# Altium PCB Mini-Rambo.PcbDoc (part 3 of 3)
Units mil, origin at the board's own origin, x right, y up, seen from the top; angles counter-clockwise.
Board outline 4133.86 x 2795.28 mil, 4 copper layers (Top, GND, Supply, Bottom), stack 61.811 mil thick; 295 components, 208 nets, 992 pads, 488 vias.
Unrouted connection lines stored in the file: 73.
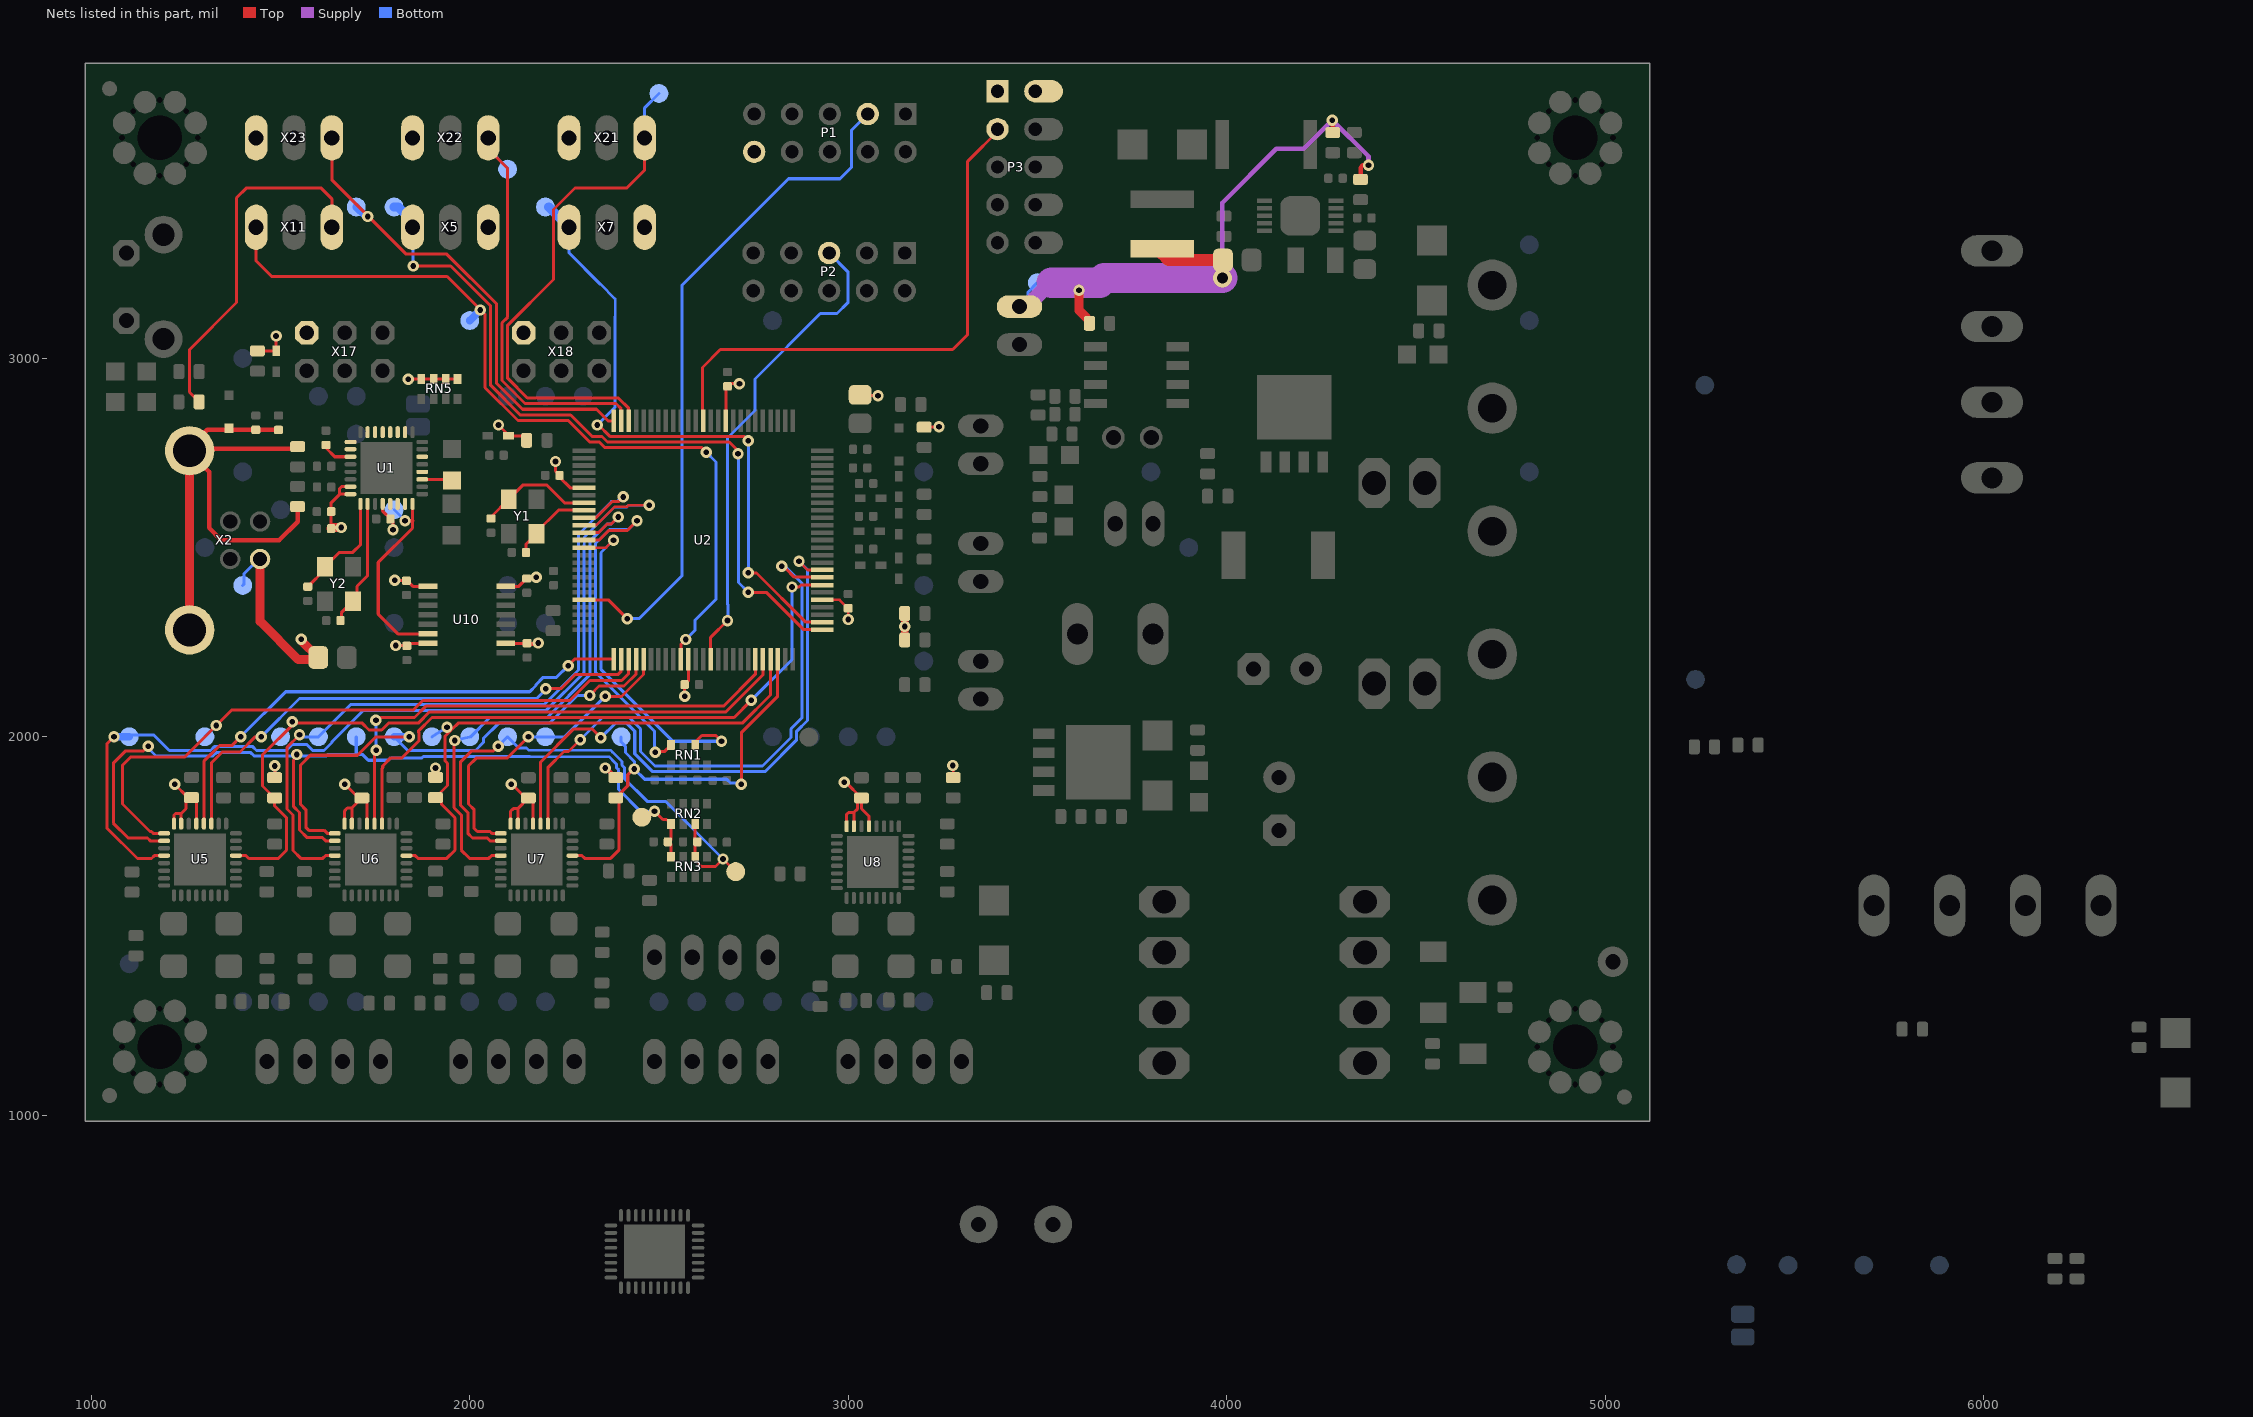
[diagram p5: the nets of this part, all layers, seen from the top]

## Via types
v1: diameter 30, hole 15, Top to Bottom, tented both sides, 231 vias
v2: diameter 30, hole 15, Top to Bottom, 224 vias
v3: diameter 19.68, hole 7.87, Top to Bottom, 12 vias
v4: diameter 32, hole 15, Top to Bottom, tented both sides, 11 vias
v5: diameter 50, hole 28, Top to Bottom, tented both sides, 3 vias
v6: diameter 50, hole 30, Top to Bottom, 3 vias
v7: diameter 45, hole 25, Top to Bottom, tented both sides, 1 vias
v8: diameter 40, hole 20, Top to Bottom, 1 vias
v9: diameter 30, hole 15, Top to Bottom, tented top, 1 vias
v10: diameter 32, hole 15, Top to Bottom, 1 vias

## Nets (pads, with @x,y where several pads share a name; then routed paths per layer and width w, separated by ;. In a path a pad name is that pad's centre, name@x,y a point inside that pad or via, vN(x,y) a via of type N, cw(c..) or ccw(c..) an arc to the next point about the centre after c; other vN are vias at no path point) (continued)
TX0-I: TP26.TP U1.8 U10.6 | length 542.7
  Top w8: U1.8@1848.9,2615.51 1848.43,2615.04 1848.43,2551.18 1758.17,2460.92 1758.17,2323.91 1810.04,2272.04 U10.6@1889.76,2272.04
  Top w10: v1(1829,2571) 1848.43,2571
  Bottom w7: TP26.TP@1800,2600 v1(1829,2571)
TX1: P1.3 U2.46 | length 1830
  Top w8: U2.46@2301.83,2362 2366.35,2362 v2(2416.34,2312.01)
  Bottom w8: v2(2416.34,2312.01) 2447.2,2312.01 2560.79,2425.59 2560.79,3193.22 2842.21,3474.65 2978.58,3474.65 3008.86,3504.92 3008.86,3602.95 P1.3@3051.57,3645.67
TX2: P3.3 U2.13 | length 1469.3
  Top w8: U2.13@2616.79,2834.96 2614.78,2836.97 2614.78,2975.96 2662.2,3023.39 3276.25,3023.39 3315.84,3062.97 3315.84,3520.84 P3.3@3400,3605
  Bottom w7: P3.3@3386.5,3605 P3.3@3400,3605
TX3: P2.5 U2.64 | length 1271.2
  Top w8: U2.64@2636.79,2205 2636.79,2262.77 v1(2681.1,2307.09)
  Bottom w8: v1(2681.1,2307.09) 2682.09,2308.07 2682.09,2349.27 2680.59,2350.76 2680.59,2355.14 2680.83,2355.38 2680.83,2789.37 2753.6,2862.14 2753.6,2945.55 2926.4,3118.35 2970.71,3118.35 2999.02,3146.65 2999.02,3229.13 P2.5@2949.61,3278.54
TXL: LED4.C U1.11 | length 79.5
  Top w8: U1.11@1874.49,2680.47 1949.77,2680.47 LED4.C@1952.76,2677.49
U1-PB0: U1.14
U1-PB4: U1.18
U1-PB5: U1.19
U1-PB6: U1.20
U1-PB7: U1.21
U1-PC2: U1.5
U1-PC4: U1.26
U1-PC5: U1.25
U1-PC6: U1.23
U1-PC7: U1.22
U1-PD0: U1.6
U1-PD1: U1.7
U1-PD6: U1.12
USBVCC: C2.2 C11.1 C14.1 C15.1 C67.2 C70.1 D4.C R47.2 RN5.1 RN5.2 RN5.3 RN5.4 TP46.TP U1.4 U1.31 U1.32 U10.1 U10.7 X2.1 X17.2 | length 1208.1
  Top w8: R47.2@1438.97,3019.89 1439.17,3019.69 D4.C@1489.17,3019.69 1488.19,3020.67 v2(1488.19,3059.06) ; C11.1@1633.7,2550 C15.1@1633.7,2595 1633.7,2618.7 1656.1,2641.1 ; U1.32@1685,2641.1 1656.1,2641.1 ; U1.31@1685,2660.79 1660.79,2660.79 1656.1,2656.1 1656.1,2641.1 ; U1.4@1770,2615.51 1770,2596.14 C14.1@1790.35,2575.79 1797.24,2568.9 1797.24,2546.26 1797,2546.5 v2(1797,2547) ; v2(1802.17,2413.39) 1831.69,2413.39 C70.1@1832.68,2412.4 1834.65,2412.4 1849.51,2397.54 U10.1@1889.76,2397.54 ; v2(1804.13,2241.14) 1832.98,2241.14 C67.2@1833.66,2240.46 1840.24,2247.04 U10.7@1889.76,2247.04 ; v2(1837.6,2944.88) 1871.29,2944.88 RN5.4@1872.28,2945.87 RN5.3@1904.28,2945.87 RN5.2@1936.02,2945.87 RN5.1@1967.52,2945.87
  Top w24: X2.1@1445.84,2469.68 1445.84,2304.9 1547,2203.74 1593.89,2203.74 C2.2@1599.8,2209.65 1555.12,2254.32 v2(1555.12,2257.87) ; C11.1@1633.7,2550 1636.85,2553.15 v2(1660.43,2553.15)
  Bottom w8: TP46.TP@1400,2400 1403,2403 1403,2430 1442.68,2469.68 X2.1@1445.84,2469.68
USHIELD: C63.1 D16.A R72.2 RV1.1 RV2.1 X2.P$1 X2.P$2 | length 1560
  Top w12: X2.P$1@1257.58,2753.64 1250,2761.22 X2.P$1@1256.22,2761.22 ; X2.P$1@1259.84,2751.38 1311,2700.22 1311,2552.33 1343.64,2519.68 1496.06,2519.68 1545,2568.62 RV1.1@1545,2608.23 ; R72.2@1494.53,2811.01 1306.01,2811.01 X2.P$1@1256.22,2761.22 ; RV2.1@1539.45,2761.22 X2.P$1@1256.22,2761.22
  Top w24: X2.P$2@1259.84,2282.68 1259.84,2751.38 X2.P$1@1259.84,2755.91
VCC: C7.1 C8.1 C9.1 C17.1 C18.1 C23.1 C24.1 C25.1 C45.1 C52.1 C68.2 C69.1 D3.C L1.2 L2.1 P1.10 P3.1 P3.2 R5.2 R11.2 R23.1 R31.2 R35.1 R36.2 R46.2 R59.1 R60.1 R61.1 R62.1 TP32.TP U2.10 U2.31 U2.61 U2.80 U5.13 U5.15 U5.16 U6.13 U6.15 U6.16 U7.13 U7.15 U7.16 U8.13 U8.15 U8.16 U10.10 U10.16 X1.2 X5.3 X7.3 X11.3 X18.2 X21.3 X22.3 X23.3 | length 4756.9
  Top w7: U2.80@2931.79,2362 2977.57,2362 C8.1@3000,2339.57 v1(3000,2310.04) ; v2(3276.57,1924.21) 3277.56,1923.23 R62.1@3277.56,1892.1
  Top w8: U5.16@1218.4,1770.5 1218.4,1793.4 1222.4,1797.4 1237.4,1797.4 ; v1(1220,1875) C24.1@1255,1840 ; U5.15@1237.4,1770.5 1237.4,1797.4 ; U5.13@1277.4,1770.5 1277.4,1826.73 C24.1@1264.76,1839.37 1255.63,1839.37 C24.1@1255,1840 ; R35.1@1284.77,2885 1259.2,2910.57 1259.2,3022.98 1383.86,3147.64 1383.86,3424.21 1410.43,3450.79 1606.3,3450.79 1635.43,3421.65 X11.3@1635.43,3346.46 ; R60.1@1484.26,1891.93 1485,1892.67 v2(1485,1923) ; U6.16@1669.31,1770.5 1669.31,1804.31 1676.54,1811.54 1688.31,1811.54 ; v1(1670,1875) 1706.77,1838.23 C23.1@1715,1838.23 ; U6.15@1688.31,1770.5 1688.31,1811.54 ; U6.13@1728.31,1770.5 1728.31,1824.92 C23.1@1715,1838.23 ; v2(2075.79,2823.82) 2102.36,2797.24 D3.C@2102.36,2795.28 2138.58,2795.28 R46.2@2150.39,2783.46 ; U10.10@2095.13,2247.04 2151.27,2247.04 C68.2@2151.57,2247.35 2151.87,2247.05 2180.12,2247.05 2176.42,2243.35 C68.2@2161.49,2243.35 ; U10.16@2095.13,2397.54 2129.82,2397.54 C69.1@2150.59,2418.31 2153.66,2421.38 v2(2175.3,2421.38) ; U7.16@2107.93,1770.5 2107.93,1802.93 2115.16,1810.16 2126.93,1810.16 ; v1(2110,1875) 2111,1875 2147.77,1838.23 C18.1@2155,1838.23 ; U7.15@2126.93,1770.5 2126.93,1810.16 ; U7.13@2166.93,1770.5 2166.93,1826.3 C18.1@2155,1838.23 ; v2(2226.38,2727.36) 2226.38,2701.77 C9.1@2237.2,2690.94 2237.2,2685.8 2265.2,2657.8 U2.31@2301.83,2657.8 ; v2(2567.91,2107.28) C7.1@2567.91,2137.8 2577.42,2147.3 U2.61@2577.42,2205 ; U2.10@2676.79,2834.96 2676.79,2921.87 C52.1@2681.1,2926.18 2687.99,2933.07 v2(2712.6,2933.07) ; v1(2990,1880) 2993.23,1880 C17.1@3035,1838.23 ; U8.16@2995.96,1763.61 2995.96,1795 3000.96,1800 3014.96,1800 ; U8.15@3014.96,1763.61 3014.96,1800 ; L2.1@3031.5,2903.54 3033.47,2901.57 3078.74,2901.57 v2(3078.89,2901.42) ; U8.13@3054.96,1763.61 3054.96,1790.04 3035,1810 C17.1@3035,1838.23 ; v2@3149.41,2291.14 v2(3149.61,2291.34) v2@3149.41,2291.54 ; R31.2@3200.78,2818.11 3201.57,2818.9 v2(3240.16,2818.9) ; 1237.4,1797.4 1250,1810 1250,1840 C24.1@1255,1840 ; 1688.31,1811.54 C23.1@1715,1838.23 ; 2126.93,1810.16 C18.1@2155,1838.23 ; 3014.96,1800 3025,1810.04 3025,1828.23 C17.1@3035,1838.23
  Top w12: v2(2358.27,1917.32) 2360.61,1917.32 R61.1@2385.83,1892.1 ; v2(4279.56,3629.23) 4280.55,3628.24 R23.1@4280.55,3596.94 ; R11.2@4354,3472.77 4354,3504 4360,3510 v1(4375,3510)
  Top w20: R5.2@3149.41,2255.9 v2@3149.41,2291.14 ; v2@3149.41,2291.54 R36.2@3149.41,2325.78
  Top w24: v2(3610,3180) 3610,3126.77 C25.1@3630,3106.77
  Top w32: L1.2@3830,3276.26 3846.26,3260 C45.1@3990.6,3260
  Supply w12: v6(3989.05,3212.35) 3989.05,3411.65 4131.4,3554 4204.33,3554 v2(4279.56,3629.23) 4375,3533.79 v1(4375,3510)
  Supply w40: X1.2@3452.76,3136.61 3471.61,3136.61 3535,3200 3537.57,3200
  Supply w80: 3537.57,3200 3664.68,3200 3677.03,3212.35 v6(3989.05,3212.35)
  Bottom w8: X1.2@3452.76,3136.61 3452.76,3136.76 3477,3161 3475,3163 3475,3175 TP32.TP@3500,3200
  other v2: 1909.45,1917.32 2181.1,2248.03
VUCAP: C16.1 U1.27 | length 74.6
  Top w8: C16.1@1620,2763.23 1643.23,2740 U1.27@1685,2740
X-DIR: TP1.TP U2.36 U5.20 | length 2563.7
  Top w7: 2332.68,2559.37 2334.52,2559.37 2382.7,2607.55 2415.26,2607.55 2419.92,2612.2 v2(2474.41,2612.2)
  Top w8: v1(1060,2000) 1041.01,1981.01 1041.01,1759.21 1121.69,1678.54 1158.99,1678.54 1166.31,1685.85 U5.20@1192.4,1685.85 ; U2.36@2301.83,2559.37 2332.68,2559.37
  Bottom w7: 2302.41,2506.89 2302.41,2526.82 2382.43,2606.84 2414.56,2606.84 2419.92,2612.2 v2(2474.41,2612.2)
  Bottom w8: TP1.TP@1100,2000 1105,2005 1165,2005 1206,1964 1314.91,1964 1324.91,1974 1426.5,1974 1436.5,1964 1514.91,1964 1529.91,1979 1570.09,1979 1585.09,1964 1614.91,1964 1636,1985.09 1636,1986.91 1719.09,2070 2202.38,2070 2302.41,2170.03 2302.41,2506.89
  Bottom w20: v1(1060,2000) TP1.TP@1100,2000
X-EN: R60.2 TP4.TP U2.71 U5.5 | length 1952.4
  Top w8: U5.5@1381.89,1685.85 1408.84,1685.85 1416.15,1678.54 1494.26,1678.54 1515.94,1700.21 1515.94,1786.06 1484.26,1817.74 R60.2@1484.26,1838.38 1452.57,1870.07 1452.57,1952.57 v1@1536,2036 ; v1(1531,2040) 1535,2036 v1@1536,2036 ; U2.71@2774.79,2205 2774.79,2163.92 2676.87,2066 1893.88,2066 1863.88,2036 1785.09,2036 1767.09,2018 1734,2018 1716,2036 v1@1536,2036
  Bottom w8: TP4.TP@1500,2000 1534,2034 1534,2037 v1(1531,2040)
X-MAX: TP49.TP U2.60 X11.1 | length 2221.2
  Top w8: X11.1@1435.43,3346.46 1435.43,3257.48 1476.38,3216.54 1940.46,3216.54 v1@2028.5,3128.5 ; 2040.13,3116.87 2040.13,2922.65 2127.22,2835.56 2260.46,2835.56 2317.47,2778.54 2343,2778.54 2357.58,2763.96 2613.27,2763.96 v2(2625.13,2752.1) ; U2.60@2557.73,2205 2557.73,2243.74 v2(2570.99,2257)
  Bottom w8: v2(2570.99,2257) 2595.37,2281.38 2595.37,2307.97 2650.59,2363.19 2650.59,2367.57 2650.83,2367.8 2650.83,2726.4 v2(2625.13,2752.1)
  Bottom w20: TP49.TP@2000,3100 v1(2028,3128)
X-MIN: TP38.TP U2.25 X23.1 | length 1283
  Top w8: X23.1@1635.43,3582.68 1635.43,3471.86 1831.84,3275.46 1939.54,3275.46 2070.13,3144.87 2070.13,2935.08 2139.64,2865.56 2334.65,2865.56 2365.24,2834.96 U2.25@2380.57,2834.96
  Bottom w8: v1@1725,3375 v1(1730,3375)
  Bottom w20: TP38.TP@1700,3400 v1@1725,3375
X-MS1: U2.52 U5.11 | length 1378.1
  Top w8: U5.11@1316.93,1770.5 1316.93,1930.74 1345.83,1959.65 1392.72,1959.65 1433.07,2000 v2(1448.82,2000) ; v2(2200.89,2127.07) 2202,2127.07 2241.25,2127.07 2278.17,2164 2391.12,2164 2400.25,2173.13 U2.52@2400.25,2205
  Bottom w8: v2(1448.82,2000) 1549.82,2101 2177,2101 2202,2126 v2(2200.89,2127.07)
X-MS2: U2.51 U5.12 | length 1361
  Top w8: U5.12@1297.24,1770.5 1297.24,1935.1 1338.79,1976.65 1371.06,1976.65 v2(1394.42,2000) ; v2(2260,2188) 2277,2205 U2.51@2380.57,2205
  Bottom w8: v2(1394.42,2000) 1513.42,2119 2158.23,2119 2174.89,2135.66 2174.89,2137.84 2194.05,2157 2229,2157 v2(2260,2188)
X-STEP: TP2.TP U2.53 U5.17 | length 1762.5
  Top w8: U5.17@1192.4,1744.91 1163.56,1744.91 1158.93,1749.54 1155.21,1749.54 1082.48,1822.26 1082.48,1924.84 1103.64,1946 1246,1946 v1(1330,2030) 1371,2071 1851,2071 1876,2096 2264.21,2096 2317.21,2149 2401.5,2149 2419.94,2167.44 U2.53@2419.94,2205
  Bottom w8: TP2.TP@1300,2000 v1(1330,2030)
XT1: C13.1 U1.1 Y2.1 | length 297.2
  Top w8: C13.1@1571.85,2396.65 1617.54,2442.34 Y2.1@1617.54,2449.4 1655.54,2487.4 1690.94,2487.4 1711,2507.45 U1.1@1711,2615.51
XT2: C12.1 U1.2 Y2.3 | length 313.6
  Top w8: C12.1@1658.46,2307.09 1660.43,2309.06 1660.43,2327.6 Y2.3@1690.95,2358.12 ; Y2.3@1703.74,2378.94 1701.77,2380.91 1701.77,2397.66 1729.65,2425.54 1729.65,2615.17 U1.2@1730,2615.51
XTAL1: C57.1 U2.34 Y1.1 | length 214.5
  Top w8: C57.1@2148.62,2487.2 2148.62,2508.77 Y1.1@2176.56,2536.72 2176.56,2540.96 2234.35,2598.74 U2.34@2301.83,2598.74
XTAL2: C58.1 U2.33 Y1.3 | length 304.8
  Top w8: C58.1@2056.1,2576.77 2056.1,2580.95 Y1.3@2103.15,2627.99 2141.15,2665.99 2202.53,2665.99 2250.1,2618.43 U2.33@2301.83,2618.43
XY-REF: C48.1 RN2.5 RN3.4 TP6.TP TP72.TP U5.18 U6.18 | length 2426.4
  Top w8: v2(1150,1975) 1138,1963 1090.74,1963 1058.01,1930.28 1058.01,1771.71 1097.19,1732.54 1107.88,1732.54 1148.37,1732.54 1155.69,1725.22 U5.18@1192.4,1725.22 ; 1534.69,1939 1534.69,1815.39 1549.94,1800.14 1549.94,1753.79 1570.45,1733.27 1611.02,1733.27 1619.07,1725.22 U6.18@1643.31,1725.22 ; TP72.TP@2454.72,1787.4 2472.44,1787.4 v2(2488.19,1803.15) 2510.04,1781.3 2519.68,1781.3 RN2.5@2531.72,1769.26 2531.72,1727.59 2526.57,1722.44 2531.72,1717.29 RN3.4@2531.72,1683.07
  Bottom w7: 2159.1,1947.56 2367.96,1947.56 2377.26,1938.26
  Bottom w8: v2@1155,1975 1155,1965 1171,1949 1321.12,1949 1331.12,1959 1420.29,1959 1430.29,1949 v1@1547,1949 ; v1(1543,1953) v1@1547,1949 ; TP6.TP@1700,2000 1700,1953.75 1699,1952.75 ; 2159.1,1947.56 1877.17,1947.56 1874.02,1944.4 1791.48,1944.4 1785.08,1938 1732,1938 1717.25,1952.75 1699,1952.75 ; 2377.26,1938.26 2387.19,1928.33 2387.19,1918.79 2393.4,1912.58 2393.4,1860.6 2450.85,1803.15 v2(2488.19,1803.15) ; v1@1547,1949 1621.12,1949 1624.88,1952.75 1699,1952.75
XY-REF-PWM: RN1.4 U2.38 | length 967
  Top w8: U2.38@2301.83,2520 2342.39,2520 2368.08,2545.68 2416.75,2545.68 v2(2441.93,2570.87) ; v2(2490.28,1958.76) 2490.06,1958.76 2488.19,1960.63 2514.01,1960.63 RN1.4@2531.72,1978.35
  Bottom w7: 2332.41,2495.16 2332.41,2510.97 2369.57,2548.13 2419.2,2548.13 v2(2441.93,2570.87)
  Bottom w8: 2332.41,2495.16 2332.41,2170.54 2488.19,2014.76 2488.19,1960.63 2490.06,1958.76 v2(2490.28,1958.76)
Y-DIR: TP0.TP U2.35 U6.20 | length 1907.5
  Top w8: v1(1550,2005) 1517,1972 1517,1809.04 1532.94,1793.1 1532.94,1699.35 1553.57,1678.71 1611.58,1678.71 1618.72,1685.85 U6.20@1643.31,1685.85 ; U2.35@2301.83,2579.06 2333.7,2579.06 2376.69,2622.05 2393.7,2622.05 v2(2405.51,2633.86)
  Bottom w7: 2287.41,2528.9 2287.41,2535.13 2374.32,2622.05 2389.76,2622.05
  Bottom w8: v1(1550,2005) 1550,2000 TP0.TP@1600,2000 1685,2085 2196.16,2085 2287.41,2176.24 2287.41,2528.9 ; 2389.76,2622.05 2401.57,2633.86 v2(2405.51,2633.86)
Y-EN: R59.2 TP7.TP U2.72 U6.5 | length 1529.4
  Top w8: U6.5@1832.8,1685.85 1856.12,1685.85 1863.26,1678.71 1939.31,1678.71 1960.82,1700.21 1960.82,1786.01 1925.2,1821.63 1925.2,1834.45 R59.2@1921.26,1838.38 ; R59.2@1909.45,1839.37 1941.14,1871.05 1941.14,1930 1934,1937.14 1934,2000.77 v1@1949.12,2015.88 ; v1(1940,2025) 1945,2020 1953.23,2020 1969.23,2036 2720.41,2036 2794.79,2110.38 U2.72@2794.79,2205
  Bottom w8: TP7.TP@1900,2000 v1(1940,2025)
Y-MAX: TP39.TP U2.76 X5.1 | length 1999.7
  Top w8: v2(1850.39,3244.09) 1949.69,3244.09 2055.13,3138.66 2055.13,2928.86 2133.43,2850.56 2266.67,2850.56 2323.69,2793.54 2349.21,2793.54 2363.8,2778.96 2685.6,2778.96 2716.53,2748.03 v1(2708.66,2748.03) ; v1(2736.22,2381.89) 2783.47,2381.89 2882.35,2283 U2.76@2931.79,2283
  Bottom w8: X5.1@1848.82,3362.18 X5.1@1848.82,3346.46 1850.39,3344.88 v2(1850.39,3244.09) ; v1(2708.66,2748.03) 2710.22,2746.46 2710.22,2407.89 v1(2736.22,2381.89)
  Bottom w24: TP39.TP@1800,3400 1811,3400 X5.1@1848.82,3362.18
Y-MIN: TP40.TP U2.24 X22.1 | length 1150.6
  Top w8: X22.1@2048.82,3582.68 2048.82,3553.18 2100.13,3501.87 2100.13,3108.83 2085.13,3093.83 2085.13,2941.29 2145.86,2880.56 2386.52,2880.56 2400.25,2866.83 U2.24@2400.25,2834.96
  Bottom w8: X22.1@2048.82,3582.68 2048.82,3554.18 2100,3503 TP40.TP@2100,3500
Y-MS1: U2.82 U6.11 | length 1643.4
  Top w8: U6.11@1767.84,1770.5 1767.84,1916.1 1770.09,1918.36 1770.09,1923.01 1791.48,1944.4 1821.17,1944.4 1866,1989.23 1866,2010.77 1864,2012.77 1864,2014.91 1900.09,2051 2698.64,2051 v2(2744.09,2096.46) ; v2(2851.38,2395.67) 2870.08,2395.67 2875.41,2401 U2.82@2931.79,2401
  Bottom w8: v2(2744.09,2096.46) 2851.38,2203.74 v2(2851.38,2395.67)
Y-MS2: U2.70 U6.12 | length 1370.4
  Top w8: v2@1747,1960 v2@1748.15,1960 ; U6.12@1748.15,1770.5 v2@1748.15,1960 ; v2(1752,2044) 1759,2051 1854,2051 1884,2081 2670.66,2081 2754.79,2165.13 U2.70@2754.79,2205 ; v2(1753,1964) 1749,1960 v2@1748.15,1960
  Bottom w8: v2(1752,2044) 1752,1965 v2(1753,1964)
Y-STEP: TP5.TP U2.54 U6.17 | length 1399
  Top w8: U6.17@1643.31,1744.91 1623.42,1744.91 1615.37,1752.95 1574.81,1752.95 1566.94,1760.83 1566.94,1807.18 1552.69,1821.43 1552.69,1925.11 1578.8,1951.21 1703.44,1951.21 1752.23,2000 v1(1840,2000) ; v2@2320.87,2107.28 2320.87,2113.19 2341.68,2134 2407.71,2134 2439.62,2165.91 U2.54@2439.62,2205
  Bottom w8: TP5.TP@1800,2000 1836,1964 2014.91,1964 2036,1985.09 2036,1995.35 2076.66,2036 2210.8,2036 2284.06,2109.25 v2(2316.93,2109.25) ; v2@2316.93,2107.28 v2@2320.87,2107.28
  Bottom w20: TP5.TP@1800,2000 v1(1840,2000)
Z-DIR: TP19.TP U2.37 U7.20 | length 1403
  Top w8: v1(1960,1990) 1958.14,1988.14 1958.14,1812.73 1977.82,1793.05 1977.82,1700.33 1999.44,1678.71 2050.55,1678.71 2057.7,1685.85 U7.20@2081.93,1685.85 ; U2.37@2301.83,2539.69 2340.87,2539.69 2363.31,2562.13 2374.14,2562.13 v2(2392.72,2580.71)
  Bottom w7: 2363.07,2562.13 2374.14,2562.13 v2(2392.72,2580.71)
  Bottom w8: v1(1960,1990) 1976,1994 TP19.TP@2000,2000 ; TP19.TP@2001,1999 2053,2051 2204.59,2051 2317.41,2163.82 2317.41,2516.48 2363.07,2562.13
Z-EN: R61.2 TP10.TP U2.73 U7.5 | length 1141.7
  Top w8: U7.5@2271.42,1685.85 2296.64,1685.85 2303.78,1678.71 2372.38,1678.71 2393.89,1700.21 2393.89,1830.49 R61.2@2385.83,1838.55 2417.52,1870.24 2417.52,1900 2432.52,1915 v1(2435,1915) ; v2(2717.52,1875) 2717.52,2010.83 2813.79,2107.09 U2.73@2813.79,2205
  Bottom w8: TP10.TP@2400,2000 2400,1986 2411.26,1974.74 2411.54,1974.74 2411.54,1958.3 2435,1934.84 v1(2435,1915) 2462.24,1887.76 2679.04,1887.76 2688.98,1877.82 v2@2717.52,1877.82
Z-MAX: TP41.TP U2.77 X7.1 | length 1692.8
  Top w8: v2(2336.61,2823.82) 2340.15,2823.82 2370.01,2793.96 2724.8,2793.96 v1(2736.15,2782.62) ; v1(2736.22,2433.07) 2757.87,2433.07 2887.94,2303 U2.77@2931.79,2303
  Bottom w7: 2345,3196.2 2384.13,3157.07 2384.13,3111.22
  Bottom w8: TP41.TP@2200,3400 TP41.TP@2208.66,3400 ; X7.1@2262.2,3346.46 2262.2,3278.99 2345,3196.2 ; v2(2336.61,2823.82) 2384.13,2871.33 2384.13,3111.22 ; v1(2736.15,2782.62) 2736.22,2782.55 v1(2736.22,2433.07)
  Bottom w24: TP41.TP@2208.66,3400 X7.1@2262.2,3346.46
Z-MIN: TP48.TP U2.23 X21.1 | length 1384.3
  Top w8: U2.23@2419.94,2834.96 2419.94,2868.36 2392.74,2895.56 2152.07,2895.56 2100.13,2947.5 2100.13,3087.62 2221.2,3208.69 2221.2,3393.44 2278.06,3450.29 2414.86,3450.29 2462.2,3497.64 X21.1@2462.2,3582.68
  Bottom w8: X21.1@2462.2,3582.68 2462.2,3662.2 TP48.TP@2500,3700
Z-MS1: U2.83 U7.11 | length 1538.8
  Top w8: U7.11@2206.46,1770.5 2206.46,1918.41 2249.04,1961 2261,1961 v2@2286,1986 ; v2@2835.63,2443.9 2857.86,2421.67 2931.12,2421.67 U2.83@2931.79,2421
  Bottom w8: v2@2302,2002 2351,2051 2421.12,2051 2451,2021.12 2451,1961.27 2489.45,1922.82 2773.73,1922.82 2849,1998.09 2849,2021.12 2877.38,2049.5 2877.38,2406.44 2833.03,2450.79 v2(2824.8,2450.79)
  other v2: 2292,1992
Z-MS2: U2.84 U7.12 | length 1595.8
  Top w8: U7.12@2186.77,1770.5 2186.77,1932.77 2275,2021 2322.82,2021 v2(2346.46,1997.37) ; v2(2870.08,2463.58) 2892.66,2441 U2.84@2931.79,2441 ; U2.84@2931.79,2442 U2.84@2938.98,2442
  Bottom w8: v2(2346.46,1997.37) 2385.09,2036 2414.91,2036 2436,2014.91 2436,1955.05 2483.23,1907.82 2779.94,1907.82 2864,1991.88 2864,2014.91 2892.38,2043.29 2892.38,2441.28 v2(2870.08,2463.58)
Z-REF: C22.1 RN2.7 RN3.2 TP9.TP TP71.TP U7.18 | length 1405.7
  Top w8: v1(2075,1975) 2063,1963 2005.11,1963 1975.14,1933.03 1975.14,1819.77 1994.82,1800.09 1994.82,1745.08 2007.19,1732.71 2046.19,1732.71 2053.68,1725.22 U7.18@2081.93,1725.22 ; RN2.7@2595.47,1769.26 2595.47,1728.35 C22.1@2601.38,1722.44 2595.47,1716.54 RN3.2@2595.47,1683.07 2595.47,1674.6 2612.59,1657.48 2649.61,1657.48 v2(2669.29,1677.17) TP71.TP@2702.76,1643.7
  Bottom w7: 2150,1970 2155.5,1964.5 2372.23,1964.5 2376.99,1959.74
  Bottom w8: v1(2075,1975) TP9.TP@2100,2000 2130,1970 2150,1970 ; 2376.99,1959.74 2402.19,1934.55 2402.19,1925.01 2408.4,1918.79 2408.4,1889.6 2468.68,1829.32 2517.14,1829.32 v2(2669.29,1677.17)
Z-REF-PWM: RN1.2 U2.39 | length 936.8
  Top w7: U2.39@2301.83,2500 2360.24,2500 v2(2379.92,2519.68)
  Top w8: U2.39@2301.83,2500 U2.39@2302.39,2499.44 ; RN1.2@2595.47,1971.29 RN1.2@2595.47,1978.35 2595.47,1985.41 2613.26,2003.19 2650.35,2003.19 v2(2665.35,1988.19)
  Bottom w7: 2347.41,2485.2 2347.41,2487.17 v2(2379.92,2519.68)
  Bottom w8: 2347.41,2485.2 2347.41,2177.2 2536.42,1988.19 v2(2665.35,1988.19)
Z-STEP: TP8.TP U2.55 U7.17 | length 851.8
  Top w8: U7.17@2081.93,1744.91 2058.24,1744.91 2053.44,1749.71 2019.98,1749.71 2011.82,1757.87 2011.82,1807.3 1996.87,1822.25 1996.87,1923.41 2016.79,1943.32 2098.32,1943.32 v1(2155,2000) ; v2(2358.38,2107.39) 2358.38,2106.41 2358.27,2106.3 2401.22,2106.3 2459.31,2164.38 U2.55@2459.31,2205
  Bottom w8: v1(2155,2000) TP8.TP@2200,2000 2251,2000 v2(2358.38,2107.39)
pads on no net: FID1.1 FID2.1 FID3.1 H1.0 H2.0 H3.0 H4.0 J1.1 J1.2 J1.3 J1.4 J1.5 J1.6 RN1.3 RN3.3 RN5.8 U4.1 U4.2 U4.3 U4.4 U4.5 U4.6 U4.7 U4.8 U4.9 U4.10 U4.11 U4.12 U4.13 U4.14 U4.15 U4.16 U4.17 U4.18 U4.19 U4.20 U4.21 U4.22 U4.23 U4.24 U4.25 U4.26 U4.27 U4.28 U4.29 U4.30 U4.31 U4.32 U4.33 U4.34 U4.35 U4.36 U4.37 U5.2 U5.4 U5.21 U5.23 U5.26 U5.28 U5.29 U5.31 U6.2 U6.4 U6.21 U6.23 U6.26 U6.28 U6.29 U6.31 U7.2 U7.4 U7.21 U7.23 U7.26 U7.28 U7.29 U7.31 U8.2 U8.4 U8.21 U8.23 U8.26 U8.28 U8.29 U8.31 U10.13 X13.1 X13.2
copper on no net:
  other v3: 2423.23,596.46 2466.54,596.46 2509.84,596.46 2553.15,596.46 2423.23,639.76 2466.54,639.76 2509.84,639.76 2553.15,639.76 2423.23,683.07 2466.54,683.07 2509.84,683.07 2553.15,683.07

## Polygon pours and split planes (outlines as drawn)
GND on Top "FanGnd" (solid, shelved, pour order 79): 3640.75,3044.29 3818.9,3044.29 3829.72,3033.46 3829.72,2854.33 3817.91,2842.52 3701.77,2842.52 3683.07,2861.22 3670.28,2861.22 3638.78,2892.72 3638.78,3042.32 3640.75,3044.29
GND on Top "Top-MotorThermal" (solid, shelved, pour order 107): 1059.06,1879.06 1125,1945 3390,1945 3503.94,1831.06 3503.94,1433.07 3421.26,1350.39 1179.61,1350.39 1059.06,1470.94
GND on Top "SMPS" (solid, shelved, pour order 95): 4072,3428 4100,3456 4188,3456 4238,3506 4238,3629 4113,3629 4064,3580 4062,3578 4062,3445 4062,3428
NetC40_2 on Top "SMPS" (solid, shelved, pour order 93): 4058,3362 4035.23,3384.77 3991,3384.77 3884.77,3491 3869,3491 3853,3507 3853,3583 3815,3621 3729,3621 3711,3603 3711,3521 3711,3408 3757,3362 3768,3351 4040,3351 4055,3351 4058,3354
NetD9_A on Top "SMPS" (solid, shelved, pour order 90): 4055,3395 4055,3531 4055,3580 4006,3629 3893,3629 3869,3605 3869,3516 3881,3504 3898,3504 3979,3423 4006,3396 4052,3396
GND on Top "SMPS GND" (solid, shelved, pour order 86): 4465,3667 4465,3161 4445,3161 4416,3161 4405,3172 4405,3659 4410,3664 4413,3667 4465,3667
GND on Top "SMPS GND" (solid, shelved, pour order 78): 3700.56,3186.18 3704.76,3181.98 4465,3181.98 4465,3161 4428,3124 3652,3124 3629,3147 3629,3676 3659,3706 4426,3706 4465,3667 4465,3649.2 3704.76,3649.2 3700.56,3645
+12V on Top "F1-Top" (solid, shelved, pour order 85): 3566.93,1161.42 3673.23,1161.42 3700.79,1188.98 3700.79,1421.26 3681.1,1440.94 3610.24,1440.94 3582.68,1413.39 3519.68,1413.39 3444.88,1338.58 3444.88,1279.53 3566.93,1157.48
NetD6_A on Top "Power Inputs" (solid, shelved, pour order 109): 4488.19,3228.35 4724.41,3228.35 4753.94,3198.82 5000,3198.82 5039.37,3238.19 5039.37,3366.14 5000,3405.51 4862.2,3405.51 4734.25,3533.46 4675.2,3533.46 4635.83,3572.83 4537.4,3572.83 4507.87,3543.31 4507.87,3454.72 4488.19,3435.04
NetD10_A on Top "Power Inputs" (solid, shelved, pour order 104): 4064.96,2677.17 4035.43,2706.69 3927.17,2706.69 3927.17,2952.76 4005.91,3031.5 5000,3031.5 5039.37,2992.13 5039.37,2814.96 5019.69,2795.28 4842.52,2795.28 4724.41,2677.17 4576.77,2677.17 4557.09,2657.48 4468.5,2657.48 4448.82,2677.17
GND on Top "Power Inputs" (solid, shelved, pour order 101): 4665.35,3118.11 4669.29,3122.05 4669.29,3220.47 4484.25,3220.47 4472.44,3208.66 4472.44,3133.86 4488.19,3118.11
GND on Top "Power Inputs" (solid, shelved, pour order 100): 4311.02,2527.56 4311.02,2661.42 4110.24,2661.42 4086.61,2637.8 4086.61,2582.68 4141.73,2527.56
PWR-IN on Top "Power Inputs" (solid, shelved, pour order 98): 4034.45,1353.35 4132.87,1353.35 4212.6,1433.07 4212.6,1602.36 4114.17,1700.79 4114.17,1749.02 4042.32,1820.87 3937.99,1820.87 3864.17,1747.05 3864.17,1653.54 3966.54,1551.18 3966.54,1421.26
BED-IN on Top "Power Inputs" (solid, shelved, pour order 94): 4607.28,1321.85 4763.78,1478.35 4763.78,2027.56 4724.41,2066.93 4527.56,2066.93 4492.13,2031.5 4492.13,1779.53 4385.83,1673.23 4385.83,1383.86 4447.83,1321.85
+12V3 on Top "Power Inputs" (solid, shelved, pour order 89): 4515.75,2188.98 4523.62,2181.1 4712.6,2181.1 4712.6,2137.8 4858.27,1992.13 4976.38,1992.13 5007.87,2023.62 5007.87,2118.11 4917.32,2208.66 4917.32,2433.07 5043.31,2559.06 5043.31,2748.03 5007.87,2783.46 4854.33,2783.46 4814.96,2744.09 4814.96,2665.35 4665.35,2515.75 4574.8,2515.75 4515.75,2456.69
+12V2 on Top "Power Inputs" (solid, shelved, pour order 81): 4491.14,2181.1 4502.95,2192.91 4502.95,2462.96 4446.22,2519.68 4369.4,2519.68 4369.4,2228.04 4416.34,2181.1
+12V2 on Top "Power Inputs" (solid, shelved, pour order 77): 4310.04,2161.42 4333.66,2185.04 4343.5,2185.04 4493.31,2185.04 4501.34,2193.07 4446.22,2248.19 4446.22,2519.68 4368.19,2519.68 4107.95,2259.45 4107.95,2235.69 4107.95,2073.12 4252.26,2073.12 4275.59,2096.46 4275.59,2126.97
GND1 on Top "Top-CryGND1" (solid, shelved, pour order 96): 1686.02,2629.92 1686.02,2539.37 1648.62,2501.97 1583.66,2501.97 1539.37,2457.68 1539.37,2324.8 1593.5,2270.67 1715.55,2270.67 1734.25,2289.37 1734.25,2318.9 1747.05,2331.69 1747.05,2481.3 1789.37,2523.62 1761.81,2551.18 1761.81,2631.89
GND1 on Top "Top-GND1" (solid, remove dead copper, shelved, pour order 99): 1022.64,2146.65 1879.92,2146.65 1933.07,2199.8 1933.07,2453.74 1990.16,2510.83 1990.16,2970.47 1835.63,3125 1482.28,3125 1355.32,2998.03 1356.3,2997.05 1356.3,2834.65 1022.64,2834.65
GND on Top "Top-GND-ICoupler" (solid, shelved, pour order 88): 1992.13,2496.06 1944.88,2448.82 1944.88,2192.91 1901.57,2149.61 1901.57,2133.86 1913.39,2122.05 2157.48,2122.05 2216.54,2181.1 2216.54,2393.7 2181.1,2429.13 2070.87,2429.13 2003.94,2496.06
VCC on Supply "Top-VCC2" (solid, shelved, pour order 106): 2610.24,3665.35 2645.67,3700.79 3415,3700 3435,3720 3525,3720 3464.57,3660.43 3464.57,2976.38 3393.7,2905.51 2740.16,2905.51 2614.17,3031.5
VCC on Supply "Top-VCC" (solid, remove dead copper, shelved, pour order 91): 1140,1865 3275,1865 3357.28,1947.83 3357.28,1990.16 3259.84,2087.6 3259.84,3610.24 3192.91,3677.17 1401.57,3677.17 1362.2,3637.8 1362.2,3299.21 1468.5,3192.91 1921.26,3192.91 2027.56,3086.61 2027.56,2484.25 2066.93,2444.88 2129.92,2444.88 2141.73,2433.07 2141.73,2161.42 2114.17,2133.86 1125.98,2133.86 1039.37,2047.24 1039.37,1964.57 1110.24,1893.7
NetD6_A on Supply "Power Inputs" (solid, shelved, pour order 108): 4517.72,3248.03 4714.57,3248.03 4714.57,3395.67 4517.72,3395.67
NetD10_A on Supply "Power Inputs" (solid, shelved, pour order 103): 4006.89,3031.5 4668.2,3031.5 4668.2,2768.65 4576.77,2677.17 4064.96,2677.17 4035.43,2706.69 3927.17,2706.69 3927.17,2951.77
USBVCC on Supply "Top-USBVCC" (solid, shelved, pour order 87): 2030,2150 2050,2170 2050,2420 1990,2480 1990,2960 1830,3120 1490,3120 1420,3050 1420,2780 1490,2710 1490,2290 1450,2250 1450,2170 1470,2150
GND on Bottom "Btm-GND" (solid, remove dead copper, shelved, pour order 112): 1005.91,3578.74 1005.91,2891.73 1102.36,2795.28 1417.32,2795.28 1850.39,2362.2 1850.39,2165.35 2380.47,2165.35 2519.68,2026.13 3485.68,2026.13 3661.42,1850.39 3661.42,1102.36 3752.95,1010.83 4920.28,1010.83 5093.5,1184.06 5093.5,3583.66 4937.01,3740.16 1167.32,3740.16
GND1 on Bottom "Top-GND1" (solid, shelved, pour order 97): 1022.64,2146.65 1879.92,2146.65 1933.07,2199.8 1933.07,2453.74 1990.16,2510.83 1990.16,2970.47 1835.63,3125 1482.28,3125 1355.32,2998.03 1356.3,2997.05 1356.3,2834.65 1022.64,2834.65
NetD6_A on Bottom "Power Inputs" (solid, shelved, pour order 110): 4488.19,3228.35 4488.19,3446.79 4508.89,3467.49 4510.94,3472.44 4510.94,3522.75 4515.75,3527.56 4661.42,3527.56 4732.28,3456.69 4732.28,3244.09 4716.54,3228.35
NetD10_A on Bottom "Power Inputs" (solid, shelved, pour order 102): 4006.89,3031.5 4668.2,3031.5 4668.2,2768.65 4576.77,2677.17 4064.96,2677.17 4035.43,2706.69 3927.17,2706.69 3927.17,2951.77
BED-IN on Bottom "Power Inputs" (solid, shelved, pour order 92): 4606.3,1320.87 4763.78,1478.35 4763.78,2027.56 4724.41,2066.93 4519.69,2066.93 4492.13,2039.37 4492.13,1779.53 4385.83,1673.23 4385.83,1381.89 4446.85,1320.87
+12V3 on Bottom "Power Inputs" (solid, shelved, pour order 80): 4523.48,2181.24 4515.75,2188.98 4515.75,2467.52 4565.94,2517.72 4682.09,2517.72 4768.7,2431.1 4768.7,2345.47 4928.15,2186.02 4928.15,2148.62 4936.02,2140.75 4986.22,2140.75 5008.86,2118.11 5008.86,2021.65 4978.35,1991.14 4859.25,1991.14 4706.69,2143.7 4706.69,2180.2
+12V3 on Bottom "Power Inputs" (solid, shelved, pour order 84): 4917.32,2314.17 4917.32,2209.65 5008.86,2118.11 5008.86,2107.28 5007.87,2106.3 4940.94,2106.3 4803.15,2244.09 4895.52,2336.47 4917.32,2336.47
+12V3 on Bottom "Power Inputs" (solid, shelved, pour order 82): 4523.62,2181.1 4799.21,2181.1 4917.32,2299.21 4917.32,2444.88 4862.2,2500 4547.24,2500 4515.75,2468.5 4515.75,2188.98
+12V3 on Bottom "Power Inputs" (solid, shelved, pour order 83): 4901.57,2418.98 5043.31,2560.71 5043.31,2748.03 5007.87,2783.46 4854.33,2783.46 4814.96,2744.09 4814.96,2665.35 4625.98,2476.38 4625.98,2421.26
GND on Bottom "Btm-MotorThermal" (solid, shelved, pour order 105): 1047.24,1905.51 1047.24,1200.79 1196.85,1051.18 3543.31,1051.18 3629.92,1137.8 3629.92,1818.9 3496.06,1952.76 1094.49,1952.76 1047.24,1905.51
GND on Bottom "SMPS GND" (solid, shelved, pour order 111): 4465,3667 4465,3701.34 4427.17,3739.17 3625.98,3739.17 3606.3,3719.49 3604.33,3717.52 3604.33,3147 3627.33,3124 4426.91,3124 4465,3162.09 4465,3667
GND1 on GND (split plane): 1990.96,2969.35 1990.96,2510.97 1934.39,2454.39 1933.28,2452.74 1932.89,2450.79 1932.89,2199.95 1880.76,2147.81 1004.35,2147.81 1004.35,2834.9 1402.56,2834.9 1404.51,2835.29 1406.16,2836.4 1407.27,2838.05 1407.66,2840 1407.66,3050.45 1482.11,3124.9 1835.41,3124.9
GND on GND (split plane): 5098.01,1004.35 1004.35,1004.35 1004.35,2137.62 1882.87,2137.62 1884.82,2138.01 1886.48,2139.11 1941.6,2194.23 1942.7,2195.88 1943.09,2197.83 1943.09,2448.68 1999.67,2505.25 2000.77,2506.91 2001.16,2508.86 2001.16,2971.46 2000.77,2973.41 1999.67,2975.06 1841.12,3133.6 1839.47,3134.71 1837.52,3135.1 1480,3135.1 1478.05,3134.71 1476.4,3133.6 1398.95,3056.16 1397.85,3054.51 1397.46,3052.56 1397.46,2845.1 1004.35,2845.1 1004.35,3759.43 5098.01,3759.43

## Other copper
Top:
  region net GND: 3454.72,1584.65 3324.8,1584.65 3324.8,1478.35 3454.72,1478.35
  rectangle net GND: 6433.07,1022.64 6590.55,1121.06
  rectangle net GND: 1188.98,1405.51 1244.09,1452.76
  rectangle net GND: 1334.65,1405.51 1389.76,1452.76
  rectangle net GND: 1637.8,1405.51 1692.91,1452.76
  rectangle net GND: 1779.53,1397.64 1834.65,1444.88
  rectangle net GND: 2070.87,1397.64 2125.98,1444.88
  rectangle net GND: 2220.47,1397.64 2275.59,1444.88
  rectangle net GND: 3114.17,1401.57 3169.29,1448.82
  rectangle net GND: 2964.57,1401.57 3019.68,1448.82
  region net +12V: 2881.89,1590.55 2881.89,1638.98 2881.75,1639.12 2871.4,1639.12 2830.71,1598.43 2830.71,1590.55 2842.52,1578.74 2874.02,1578.74
  region net +12V: 2362.2,1594.49 2401.57,1594.49 2409.45,1602.36 2409.45,1614.17 2377.95,1645.67 2374.02,1645.67 2358.27,1629.92 2358.27,1602.36 2362.2,1598.43
  region net +12V: 1988.19,1661.42 1996.06,1653.54 1996.06,1633.86 1976.38,1614.17 1937.01,1614.17 1917.32,1633.86 1917.32,1653.54 1925.2,1661.42
  region net +12V: 1541.54,1665.35 1557.23,1649.66 1557.23,1635.97 1531.5,1610.24 1496.06,1610.24 1472.44,1633.86 1472.44,1653.54 1484.25,1665.35
  region net +12V: 1094.49,1633.86 1094.49,1677.17 1090.55,1681.1 1082.68,1681.1 1055.12,1653.54 1055.12,1641.73 1062.99,1633.86
  region net +12V: 3338.58,1618.11 3338.58,1649.61 3330.71,1657.48 3291.34,1657.48 3291.34,1637.8 3318.9,1610.24 3330.71,1610.24
Supply:
  rectangle net GND: 2893.7,1417.32 3303.15,1850.39
  rectangle net GND: 2000,1422 2342.52,1850.39
  rectangle net GND: 1555.12,1422 1913.39,1850.39
  rectangle net GND: 1110.24,1417.32 1472.44,1850.39
GND (plane layer: these items are gaps in the copper):
  lines w10: 984.25,2142.72 1882.87,2142.72 1937.99,2197.83 1937.99,2450.79 1996.06,2508.86 1996.06,2971.46 1837.52,3130 1480,3130 1402.56,3052.56 1402.56,2840 984.25,2840

## Silkscreen, mask and mechanical layers (free items; w line width, h text height)
Top Overlay:
  circle w5: c1072,1363 r42
  rectangle: 4271.65,604 5189.96,875
  lines w6: 4303.98,556.18 4303.98,366.18 4730.31,366.18 ; 4730.31,551.18 4730.31,366.18 ; 5153.98,550.87 5153.98,366.18 4730.31,366.18
  lines w10: 2849.41,3493.11 2849.41,3442.91 3048.23,3442.91 3048.23,3490.16 ; 2851.38,3126.97 2851.38,3076.77 3050.2,3076.77 3050.2,3124.02
  text "X-MIN" at 1472.44,3688.98 h32
  text "Y-MIN" at 1885.83,3688.98 h32
  text "Z-MIN" at 2295.28,3688.98 h32
  text "Extensions" at 2818.9,3370.08 h50
  text "X-MAX" at 1464.57,3204.72 h32
  text "Y-MAX" at 1874.02,3204.72 h32
  text "Z-MAX" at 2287.4,3204.72 h32
  text "5V" at 3655,3160 h32 r90
  text "Endstops" at 2101.38,3137.8 h50
  text "ICSP-1" at 1637.8,3133.86 h32
  text "T0" at 3057.09,2933.07 h50
  text "ICSP" at 2228.35,2875.98 h32
  text "Fan2" at 3889.76,2767.72 h50
  text "TX" at 1996.06,2669.29 h32
  text "Fan1" at 3938.98,2651.57 h50
  text "RX" at 2000,2614.17 h32
  text "T1" at 3057.09,2342.52 h50
  text "s" at 1279,2287 h32
  text "-" at 1219,2276 h32
  text "+" at 1153,2275 h32
  text "Hardware" at 1131.89,2230.32 h32 r270
  text "Open Source" at 1181.1,2230.32 h32 r270
  text "T2" at 3057.09,2181.1 h50
  text "UltiMachine" at 1062.99,2137.8 h36 r270
  text "Therm" at 2953.74,2090.55 h50
  text "Mini-Rambo 1.3a" at 1326,2063 h40
  text "Motors" at 1997.05,1983.27 h50
  text "EREF" at 2840.55,1935.04 h32
  text "XREF" at 2410.43,1823.82 h32
  text "ZREF" at 2733.27,1665.35 h32
  text "Z MOTOR 1" at 2510,1545 h32
  text "U" at 1051,1331 h60
  text "E MOTOR" at 3095.47,1328.74 h32
  text "Y MOTOR" at 2017.72,1309.06 h32
  text "X MOT" at 1540,1305 h32
  text "Z MOTOR 2" at 2500,1259.84 h32
  text "PWR IN" at 4379.92,478.35 h50
  text "BED IN" at 4806.1,478.35 h50
  text "-      +" at 4750.98,476.38 h50
  text "-      +" at 4327.76,475.39 h50
  text "Power Input" at 4423.23,260.83 h50
Bottom Overlay:
  text "ZMIN" at 2550,3600 h32 r270
  text "YMIN" at 2125,3550 h32 r270
  text "XMIN" at 1700,3450 h32 r270
  text "XMAX" at 1750,3450 h32 r270
  text "EXT-" at 4750,3285 h32
  text "YMAX" at 2150,3250 h32 r270
  text "5V" at 3575,3150 h32 r270
  text "EXT+" at 4750,3085 h32
  text "ZMAX" at 1925,3050 h32 r270
  text "MOSI" at 2715,2990 h32 r270
  text "BED-" at 4750,2885 h32
  text "RST2" at 1425,2850 h32 r270
  text "RST" at 1925,2800 h32 r270
  text "SCK2" at 1750,2775 h32 r270
  text "D+" at 1385,2750 h32 r270
  text "MISO2" at 1525,2750 h32 r270
  text "SCK" at 2185,2750 h32 r270
  text "RST" at 2285,2750 h32 r270
  text "T0" at 3185,2745 h32 r270
  text "MISO" at 2085,2725 h32 r270
  text "BED+" at 4750,2685 h32
  text "FAN1" at 3880,2660 h32 r270
  text "MOSI2" at 1625,2650 h32 r270
  text "D-" at 1550,2575 h32 r270
  text "TX1" at 1725,2575 h32 r270
  text "GND1" at 1250,2485 h32
  text "T1" at 3185,2475 h32 r270
  text "FAN0" at 3950,2455 h32 r270
  text "RX1" at 1725,2450 h32 r270
  text "RST" at 2080,2450 h32 r270
  text "T2" at 3185,2255 h32 r270
  text "USBVCC" at 1425,2185 h32 r270
  text "TX0" at 2080,2150 h32 r270
  text "RX0" at 2180,2150 h32 r270
  text "RST1" at 1785,2140 h32 r270
  text "12V2" at 3980,2025 h32 r270
  text "XEN" at 1485,1855 h32 r270
  text "YEN" at 1885,1855 h32 r270
  text "ZEN" at 2385,1855 h32 r270
  text "EEN" at 3085,1855 h32 r270
  text "XDIR" at 1085,1830 h32 r270
  text "YDIR" at 1585,1830 h32 r270
  text "ZDIR" at 1985,1830 h32 r270
  text "ZREF" at 2085,1830 h32 r270
  text "EREF" at 2885,1830 h32 r270
  text "XSTEP" at 1285,1800 h32 r270
  text "XYREF" at 1685,1800 h32 r270
  text "YSTEP" at 1785,1800 h32 r270
  text "ZSTEP" at 2185,1800 h32 r270
  text "E0DIR" at 2785,1800 h32 r270
  text "ESTEP" at 2985,1800 h32 r270
  text "Z1B" at 2475,1530 h32 r270
  text "Z1A" at 2575,1530 h32 r270
  text "Z2A" at 2675,1530 h32 r270
  text "Z2B" at 2775,1530 h32 r270
  text "X1B" at 1085,1450 h32 r270
  text "X1A" at 1385,1350 h32 r270
  text "X2A" at 1485,1350 h32 r270
  text "X2B" at 1585,1350 h32 r270
  text "Y1B" at 1685,1350 h32 r270
  text "Y1A" at 1985,1350 h32 r270
  text "Y2A" at 2085,1350 h32 r270
  text "Y2B" at 2185,1350 h32 r270
  text "E2B" at 2885,1350 h32 r270
  text "E2A" at 2985,1350 h32 r270
  text "E1A" at 3085,1350 h32 r270
  text "E1B" at 3185,1350 h32 r270
  text "GND" at 3960,1280 h32 r270
  text "GND" at 4285,1275 h32 r270
  text "PWR-IN" at 4085,1175 h32 r270
  text "BED-IN" at 4485,1175 h32 r270
  text "FGND" at 3890,1100 h32 r270
Top Solder:
  lines w39.37: 3675,3165 3675,3665 4425,3665 4425,3165 3675,3165
Bottom Solder:
  circle w42: c3647.64,3304.13 r20
  circle w42: c3647.64,3403.05 r20
  circle w42: c3647.64,3501.97 r20
  circle w42: c3647.64,3600.89 r20
  circle w42: c3647.64,3699.8 r20
Dimension:
  the board outline again, w8
PCB Document:
  lines w10: 3948.82,3320.87 4185.04,3320.87 4185.04,3478.35 3948.82,3478.35 3948.82,3320.87 ; 4043.31,2760.83 4043.31,3113.83 4419.76,3113.83 4419.76,2760.83 4043.31,2760.83
  text "ROHS" at 4112.2,3385.83 h30
  text "Bot Silk" at 4179.13,3334.65 h32
  text "UL" at 4243.11,2921.26 h30
  text "Bot Silk" at 4365.16,2811.02 h40

## Dimensions
5118.11,3779.53 to 984.25,3779.53 on Top Document
5118.11,984.25 to 5118.11,3779.53 on Top Document

## Text inside footprints (layer, text, board x,y; h text height)
C5: Top Overlay "+" at 3234.25,680.12 h77.5; Top Overlay "+" at 3147.64,680.12 h77.5
J1: Top Overlay "1" at 5082.2,1310.91 h60 r90
P1: Top Overlay "10" at 2606.3,3506.89 h50; Top Overlay "9" at 2652.56,3612.2 h50; Top Overlay "1" at 3225.39,3629.92 h50; Top Overlay "2" at 3220.47,3519.68 h50
P2: Top Overlay "10" at 2608.27,3154.53 h50; Top Overlay "9" at 2649.61,3258.86 h50; Top Overlay "1" at 3219.49,3254.92 h50; Top Overlay "2" at 3215.55,3154.53 h50
P3: Top Overlay "10" at 3474.68,3245.71 h50 r270; Top Overlay "9" at 3374.68,3245.71 h50 r270; Top Overlay "1" at 3273.23,3727.09 h50 r270; Top Overlay "2" at 3578.35,3732.99 h50 r270
X1: Top Document "1" at 3515.26,2974.11 h62 r90
X3: Top Overlay "1" at 6107.64,2599.25 h77.5 r90; Top Overlay "2" at 6107.64,2784.25 h77.5 r90; Top Overlay "3" at 6107.64,2984.25 h77.5 r90; Top Overlay "4" at 6107.64,3184.25 h77.5 r90
X5: Top Document "1" at 1786.32,3283.96 h62
X7: Top Document "1" at 2199.7,3283.96 h62
X9: Top Document "1" at 3868.41,2625.49 h62 r180
X10: Top Overlay "4" at 5810.83,1639.13 h77.5 r180; Top Overlay "3" at 6010.83,1639.13 h77.5 r180; Top Overlay "2" at 6210.83,1639.13 h77.5 r180; Top Overlay "1" at 6395.83,1639.13 h77.5 r180
X11: Top Document "1" at 1372.93,3283.96 h62
X12: Top Document "1" at 3287.89,2262.11 h62 r270
X13: Top Overlay "1" at 3890.71,2356.65 h77.5 r180; Top Overlay "2" at 3705.71,2356.65 h77.5 r180
X21: Top Document "1" at 2524.7,3645.18 h62 r180
X22: Top Document "1" at 2111.32,3645.18 h62 r180
X23: Top Document "1" at 1697.93,3645.18 h62 r180
X27: Top Document "1" at 3287.89,2884.15 h62 r270
X28: Top Document "1" at 3287.89,2573.13 h62 r270